# Altium PCB JD_BopIt_PCB.PcbDoc
Units mil, origin at the board's own origin, x right, y up, seen from the top; angles counter-clockwise.
Board outline 3645 x 3295 mil, 2 copper layers (Top Layer, Bottom Layer); 38 components, 58 nets, 164 pads, 0 vias.
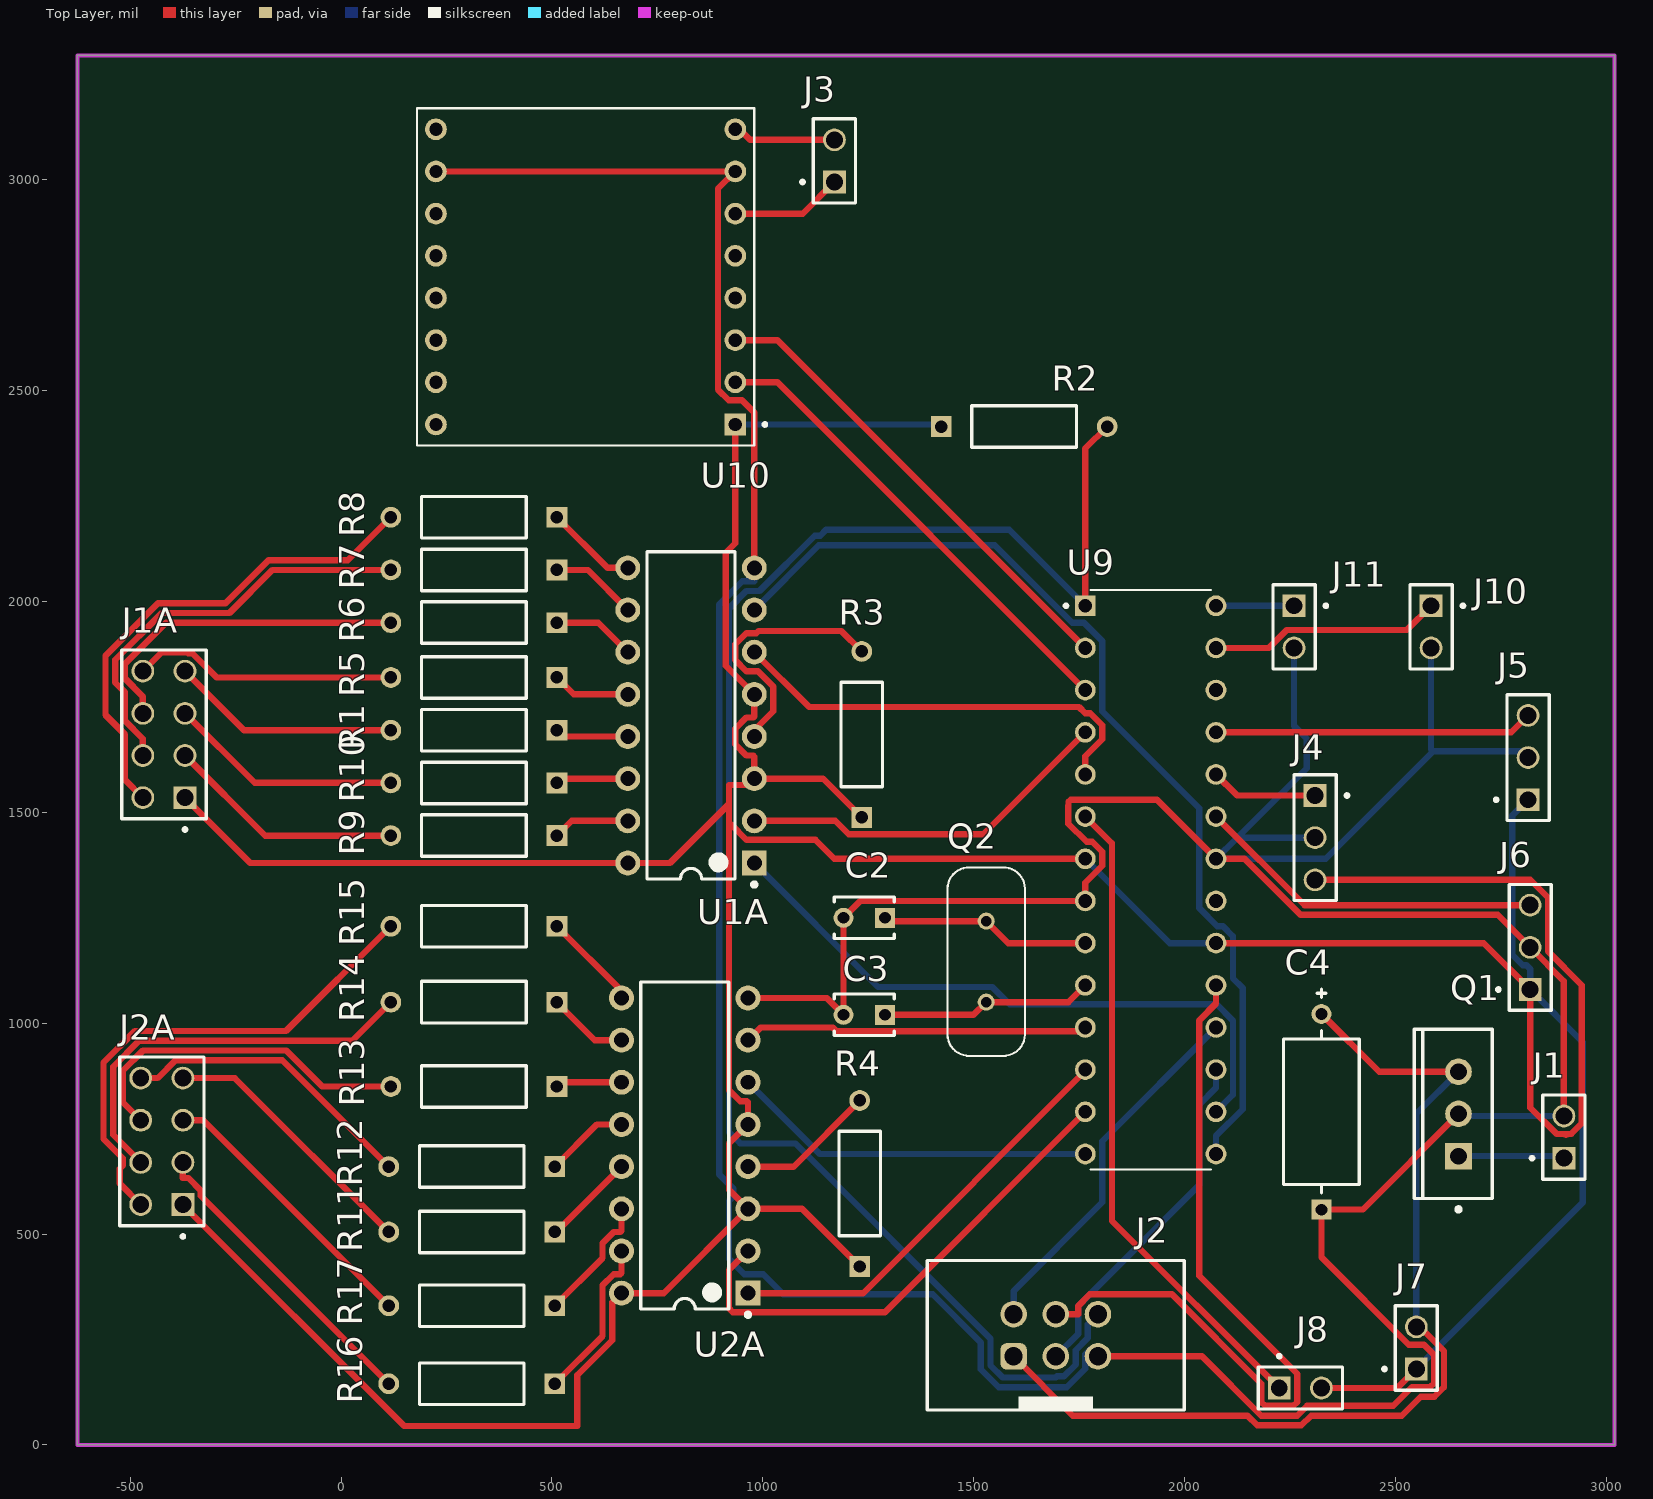
[diagram p0: Top Layer view]
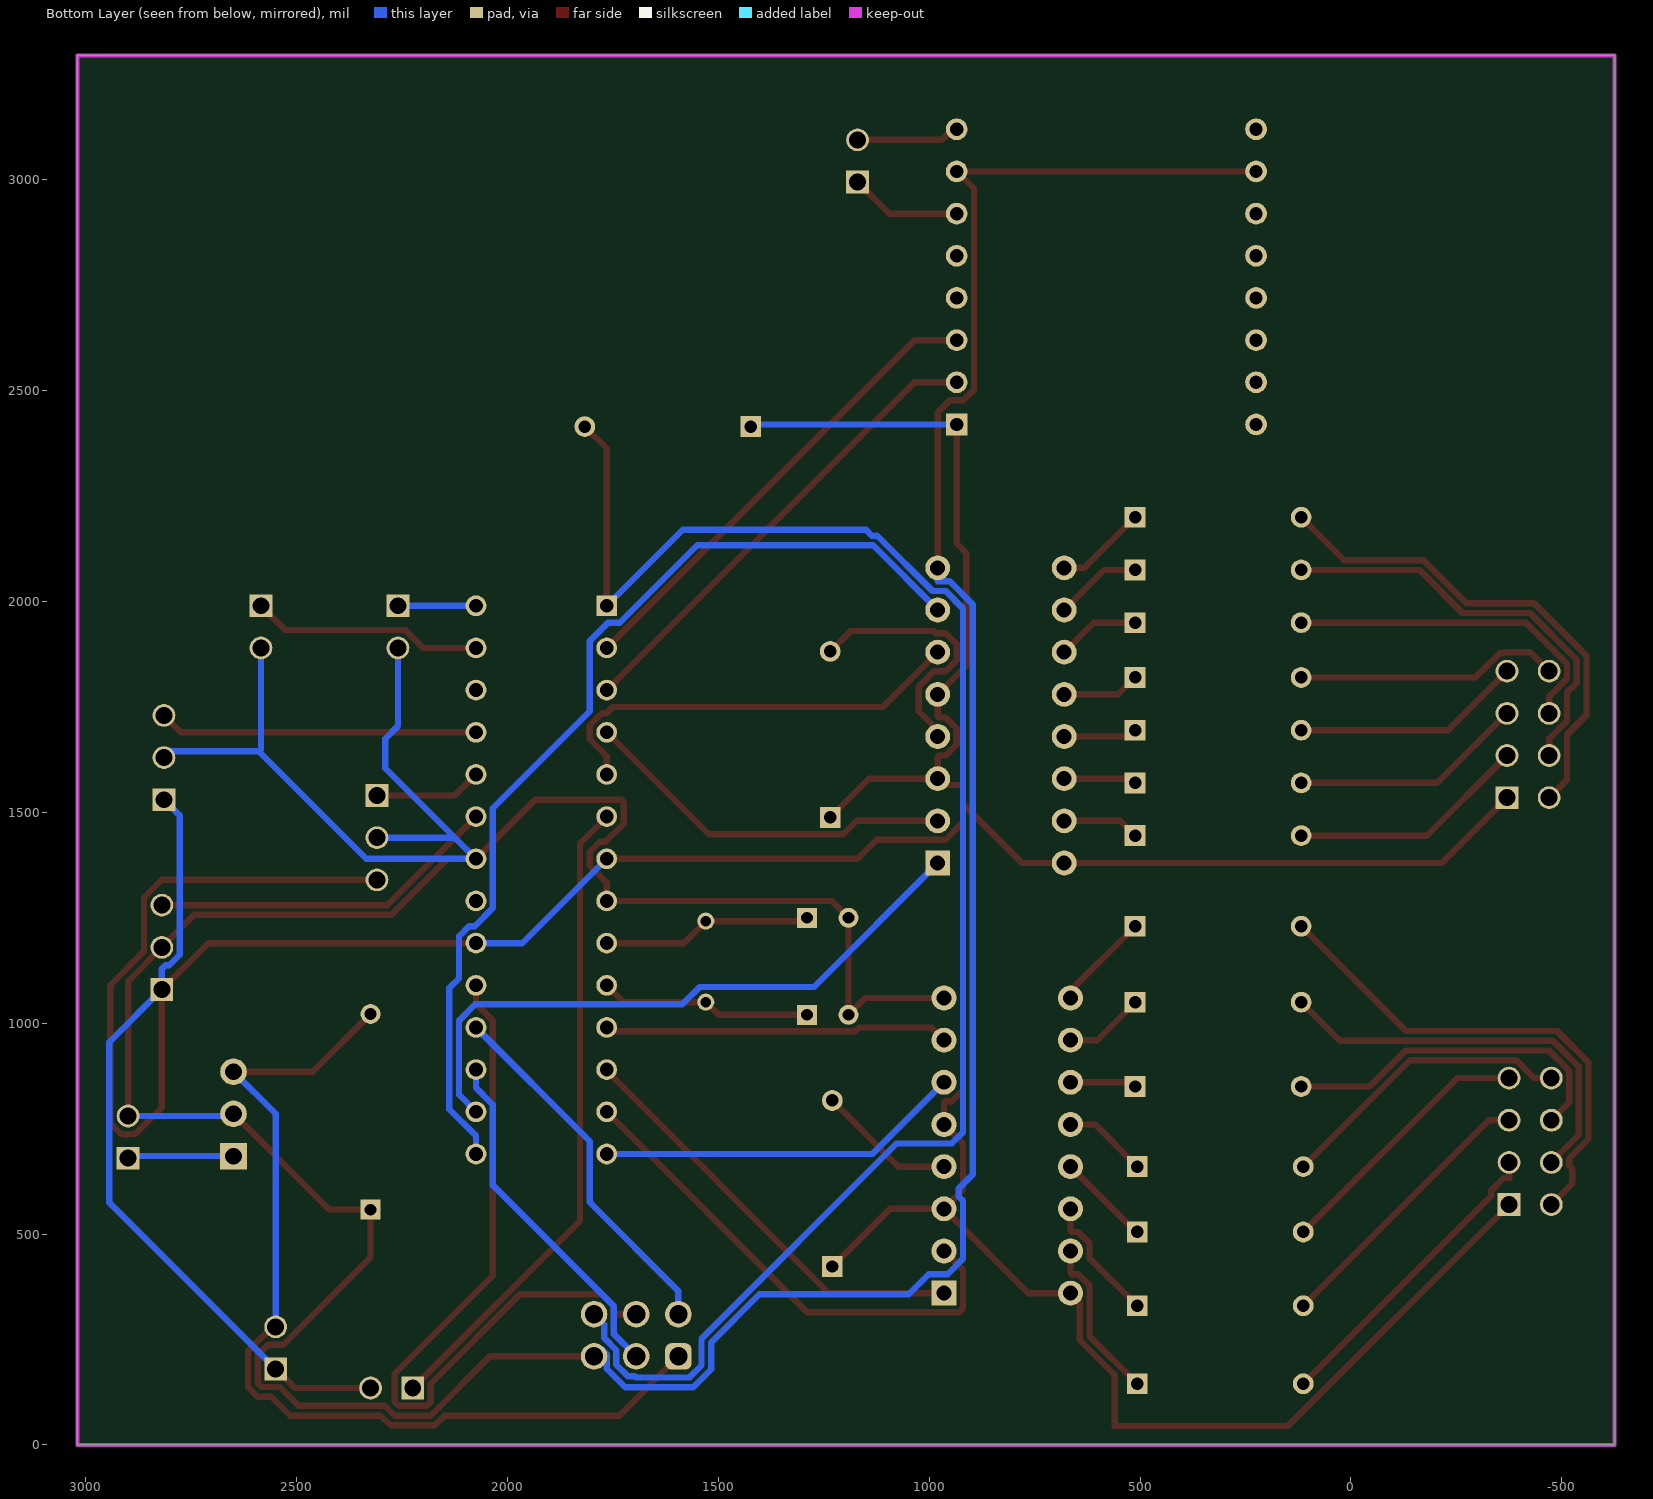
[diagram p1: Bottom Layer view, seen from below]
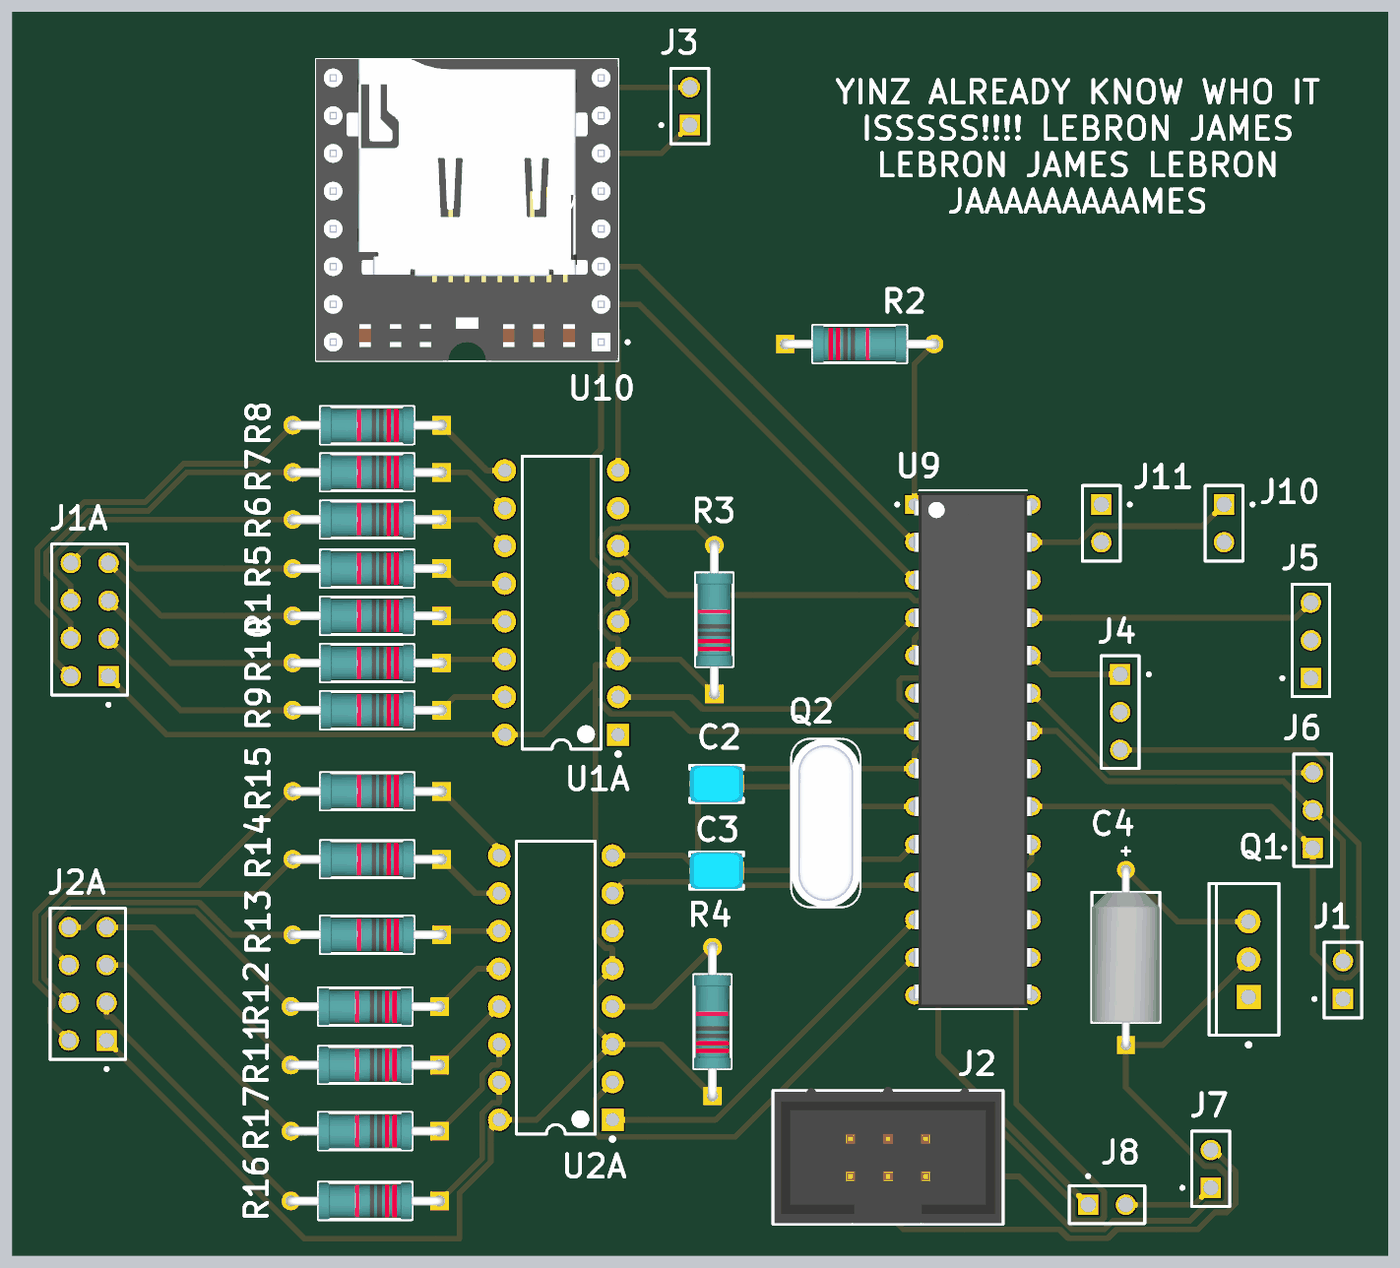
[diagram p2: 3D render of the assembled board from above, using the file's embedded part models]

## Layer stack, top to bottom
Top Solder: solder mask 0.4, Solder Resist, Dk 3.5
Top Layer: signal copper 1.4
Dielectric 1: dielectric 12.6, FR-4, Dk 4.8
Bottom Layer: signal copper 1.4
Bottom Solder: solder mask 0.4, Solder Resist, Dk 3.5

## Board outline
-625,0 3020,0 3020,3295 -625,3295

## Design rules (kind name [scope] priority, off if disabled: settings)
BoardOutlineClearance [All] p1: gap=7.87 ignorepadtopadclearanceinfootprint=FALSE except(15.75: Arc-SplitBarrior Arc-SplitContinuation Track-SplitBarrior Track-SplitContinuation SMDPad-SplitBarrior SMDPad-SplitContinuation THPad-SplitBarrior THPad-SplitContinuation Via-SplitBarrior Via-SplitContinuation Fill-SplitBarrior Fill-SplitContinuation Poly-SplitBarrior Poly-SplitContinuation Region-SplitBarrior Region-SplitContinuation Text-SplitBarrior Text-SplitContinuation)
Clearance "Clearance Bottom Layer" [OnLayer('Bottom Layer')] p1: gap=8 ignorepadtopadclearanceinfootprint=TRUE except(10: Arc-Text Track-Text SMDPad-Text THPad-Text Via-Text Fill-Text Poly-Text Region-Text Text-Text)
Clearance "Clearance Top Layer" [OnLayer('Top Layer')] p2: gap=8 ignorepadtopadclearanceinfootprint=TRUE except(10: Arc-Text Track-Text SMDPad-Text THPad-Text Via-Text Fill-Text Poly-Text Region-Text Text-Text)
Clearance [All] p3: gap=7.87 ignorepadtopadclearanceinfootprint=FALSE except(3.5: Arc-Arc Arc-Track Arc-SMDPad Track-Track Track-SMDPad SMDPad-SMDPad; 5: Arc-Via Track-Via SMDPad-Via THPad-Via Via-Via; 10: Arc-Text Track-Text SMDPad-Text THPad-Text Via-Text Fill-Text Poly-Text Region-Text Text-Text)
HoleSize [All] p1: absolutevalues=TRUE maxlimit=248.03 minlimit=7.87 maxpercent=80.000 minpercent=20.000
MinimumAnnularRing [All] p1: minimumring=3
MinimumSolderMaskSliver [All] p1: minsoldermaskwidth=3.94
PolygonConnect PolygonConnect_1 [All] p1: thpad.connectstyle=Relief thpad.reliefconductorwidth=20 thpad.reliefentries=4 thpad.polygonreliefangle="90 Angle" thpad.airgapwidth=10 smdpad.connectstyle=Relief smdpad.reliefconductorwidth=20 smdpad.reliefentries=4 smdpad.polygonreliefangle="90 Angle" smdpad.airgapwidth=10 via.connectstyle=Direct via.reliefconductorwidth=20 via.reliefentries=4 via.polygonreliefangle="90 Angle" via.airgapwidth=10
RoutingCorners [All] p1: cornerstyle=Round minsetback=100 maxsetback=100
RoutingVias [All] p1: holewidth=19.68 width=39.37 viastyle="Through Hole" minholewidth=7.87 minwidth=17.72 maxholewidth=39.37 maxwidth=78.74
SilkToSilkClearance [All] p1: silktosilkclearance=3.94
SilkToSolderMaskClearance [IsPad] p1: minsilkscreentomaskgap=3.94 clearancetoexposedcopper=TRUE
SolderMaskExpansion [All] p1: expansion=4 istentingtop=FALSE
SupplyNets "Schematic Supply Nets_1" [InNet('VCC')] p1: voltage=0.000
SupplyNets "Schematic Supply Nets" [InNet('GND')] p2: voltage=0.000
Width [All] p1: maxlimit=100 minlimit=3.5 preferedwidth=15
25 further rules are at their usual default settings.

## Components (designator, comment, footprint, x,y, rotation, side; value= is the part's Value field where it differs from the comment)
C2 "RCE5C2A220J0DBH03A" FP-RCE0DB-MFG 1240.79,1250 r180 top
C3 "RCE5C2A220J0DBH03A" FP-RCE0DB-MFG 1240.79,1020 r180 top
C4 "10 micro" FP-173DW-MFG 2325,790 r90 top
J1 "MTSW-101-09-T-D-231-LL" SAMTEC_MTSW-101-09-T-D-231-LL 2900,680 r0 top
J1A "TSW-104-09-L-D" SAMTEC_TSW-104-09-L-D -370,1535 r90 top
J2 "61200621621" 61200621621 1695,260 r0 top
J2A "TSW-104-09-L-D" SAMTEC_TSW-104-09-L-D -375,570 r90 top
J3 "MTSW-101-09-T-D-231-LL" SAMTEC_MTSW-101-09-T-D-231-LL 1170,2995 r0 top
J4 "HTSW-101-07-S-T" SAMTEC_HTSW-101-07-S-T 2310,1440 r180 top
J5 "HTSW-101-07-S-T" SAMTEC_HTSW-101-07-S-T 2815,1630 r0 top
J6 "HTSW-101-07-S-T" SAMTEC_HTSW-101-07-S-T 2820,1180 r0 top
J7 "MTSW-101-09-T-D-231-LL" SAMTEC_MTSW-101-09-T-D-231-LL 2550,180 r0 top
J8 "MTSW-101-09-T-D-231-LL" SAMTEC_MTSW-101-09-T-D-231-LL 2225,135 r270 top
J10 "MTSW-101-09-T-D-231-LL" SAMTEC_MTSW-101-09-T-D-231-LL 2585,1990 r180 top
J11 "MTSW-101-09-T-D-231-LL" SAMTEC_MTSW-101-09-T-D-231-LL 2260,1990 r180 top
Q1 "LM7805CT" FAIR-TO-220-3 2650,785 r180 top
Q2 "ECS-160-S-4" XTAL_ECS-160-20-4X 1530,1146.06 r90 top
R1 "330" FP-MBB0207-MFG 315,1695 r180 top
R2 "10K" FP-MBB0207-MFG 1620,2415 r0 top
R3 "10K" FP-MBB0207-MFG 1235,1685 r90 top
R4 "10K" FP-MBB0207-MFG 1230,620 r90 top
R5 "330" FP-MBB0207-MFG 315,1820 r180 top
R6 "330" FP-MBB0207-MFG 315,1950 r180 top
R7 "330" FP-MBB0207-MFG 315,2075 r180 top
R8 "330" FP-MBB0207-MFG 315,2200 r180 top
R9 "330" FP-MBB0207-MFG 315,1445 r180 top
R10 "330" FP-MBB0207-MFG 315,1570 r180 top
R11 "330" FP-MBB0207-MFG 310,505 r180 top
R12 "330" FP-MBB0207-MFG 310,660 r180 top
R13 "330" FP-MBB0207-MFG 315,850 r180 top
R14 "330" FP-MBB0207-MFG 315,1050 r180 top
R15 "330" FP-MBB0207-MFG 315,1230 r180 top
R16 "330" FP-MBB0207-MFG 310,145 r180 top
R17 "330" FP-MBB0207-MFG 310,330 r180 top
U1A "SN74LS247N" N0016A 830,1730 r180 top
U2A "SN74LS247N" N0016A 815,710 r180 top
U9 "ATMEGA328-PU" DIP787W46P254L3467H508Q28 1920,1340 r0 top
U10 "DFR0299" MODULE_DFR0299 580,2770 r180 top

## Footprints (in the part's own frame and the unit in brackets; to place one, negate y for a bottom-side part, rotate by r counter-clockwise, add the part's x,y. Pads: shape width x height; smd on the part's side, far side on the other; paste and mask are expansions set on the pad)
61200621621 [mm] "6 pins, straight, gold plating"
  rrect50% 1.6x1.6 hole 1.1: 1(-2.54,-1.27)
  round 1.6 hole 1.1: 2(-2.54,1.27) 3(0,-1.27) 4(0,1.27) 5(2.54,-1.27) 6(2.54,1.27)
  silkscreen extent -7.74,-4.5 7.74,4.5, body extent -7.64,-4.43 7.64,4.75, height 9.13
DIP787W46P254L3467H508Q28 [mm]
  rect 1.25x1.25 / inner round 1.25 / far side rect 1.25x1.25 hole 0.83: 1(-3.937,16.51)
  round 1.25 hole 0.83: 2(-3.937,13.97) 3(-3.937,11.43) 4(-3.937,8.89) 5(-3.937,6.35) 6(-3.937,3.81) 7(-3.937,1.27) 8(-3.937,-1.27) 9(-3.937,-3.81) 10(-3.937,-6.35) 11(-3.937,-8.89) 12(-3.937,-11.43) 13(-3.937,-13.97) 14(-3.937,-16.51) 15(3.937,-16.51) 16(3.937,-13.97) 17(3.937,-11.43) 18(3.937,-8.89) 19(3.937,-6.35) 20(3.937,-3.81) 21(3.937,-1.27) 22(3.937,1.27) 23(3.937,3.81) 24(3.937,6.35) 25(3.937,8.89) 26(3.937,11.43) 27(3.937,13.97) 28(3.937,16.51)
  silkscreen extent -5.2,-17.45 3.62,17.45, body extent -3.95,-17.34 3.95,17.34, height 4.57
FAIR-TO-220-3 [mm] "FM, 3-Leads, Body 10.2x4.7mm, Pitch 2.54mm"
  rect 1.6x1.6 hole 1: 1(0,2.54)
  round 1.6 hole 1: 2(0,0) 3(0,-2.54)
  silkscreen extent -2.04,-5.1 2.66,5.87, body extent -2.04,-5.1 2.66,5.1, height 18.95
FP-173DW-MFG [mm]
  rect 1.2x1.2 hole 0.7 paste-2539.97 mask+0: 1(-5.89,0)
  round 1.2 hole 0.7 paste-2539.97 mask+0: 2(5.89,0)
  silkscreen extent -4.89,-2.28 7.4,2.28, body extent -6.59,-2.38 6.59,2.38, height 0.25
FP-MBB0207-MFG [mm]
  rect 1.25x1.25 hole 0.75 paste-2539.97 mask+0: 1(-5,0)
  round 1.25 hole 0.75 paste-2539.97 mask+0: 2(5,0)
  silkscreen extent -3.15,-1.25 3.15,1.25, body extent -5.72,-1.35 5.72,1.35, height 0.25
FP-RCE0DB-MFG [mm]
  rect 1.2x1.2 hole 0.7 paste-2539.97 mask+0: 1(-1.25,0)
  round 1.2 hole 0.7 paste-2539.97 mask+0: 2(1.25,0)
  silkscreen extent -1.8,-1.25 1.8,1.25, body extent -1.95,-1.35 1.95,1.35, height 0.25
MODULE_DFR0299 [mil]
  rect 51.5x51.5 / inner round 51.5 / far side rect 51.5x51.5 hole 31.5: 1(-355,350)
  round 51.5 hole 31.5: 2(-355,250) 3(-355,150) 4(-355,50) 5(-355,-50) 6(-355,-150) 7(-355,-250) 8(-355,-350) 9(355,-350) 10(355,-250) 11(355,-150) 12(355,-50) 13(355,50) 14(355,150) 15(355,250) 16(355,350)
  silkscreen extent -429,-400 400,400, body extent -400,-400 400,400, height 246
N0016A [mm] "DIP, 16-Leads, Body 19.7x6.6mm, Pitch 2.54mm"
  rect 1.5x1.5 hole 0.9: 1(-3.81,8.89)
  round 1.5 hole 0.9: 2(-3.81,6.35) 3(-3.81,3.81) 4(-3.81,1.27) 5(-3.81,-1.27) 6(-3.81,-3.81) 7(-3.81,-6.35) 8(-3.81,-8.89) 9(3.81,-8.89) 10(3.81,-6.35) 11(3.81,-3.81) 12(3.81,-1.27) 13(3.81,1.27) 14(3.81,3.81) 15(3.81,6.35) 16(3.81,8.89)
  silkscreen extent -3.94,-9.85 2.65,10.31, body extent -3.95,-9.85 3.95,9.85, height 5.08
SAMTEC_HTSW-101-07-S-T [mm]
  rect 1.37x1.37 / inner round 1.37 / far side rect 1.37x1.37 hole 1.02: 01(0,-2.54)
  round 1.37 hole 1.02: 02(0,0) 03(0,2.54)
  silkscreen extent -2.02,-3.78 1.27,3.78
SAMTEC_MTSW-101-09-T-D-231-LL [mm]
  rect 1.37x1.37 hole 1.02: 01(0,0)
  round 1.37 hole 1.02: 02(0,2.54)
  silkscreen extent -2.02,-1.27 1.27,3.81
SAMTEC_TSW-104-09-L-D [mm]
  rect 1.37x1.37 hole 1.02: 01(0,0)
  round 1.37 hole 1.02: 02(0,2.54) 03(2.54,0) 04(2.54,2.54) 05(5.08,0) 06(5.08,2.54) 07(7.62,0) 08(7.62,2.54)
  silkscreen extent -2.02,-1.27 8.89,3.81
XTAL_ECS-160-20-4X [mm]
  round 1.03 hole 0.63: 1(-2.44,0) 2(2.44,0)
  silkscreen extent -5.68,-2.33 5.68,2.33, body extent -5.68,-2.32 5.68,2.32, height 3.5

## Part data
C2 C3: library part CMP-06035-047347-1, "Cap Ceramic 22pF 100V C0G ±5% Radial 2.5mm +125°C Ammo Pack", Capacitance=22pF, Case/Package=Radial, Dielectric=C0G, Max Operating Temperature=125°C, Min Operating Temperature=-55°C, Package Quantity=2000, Ratings=AEC-Q200, Resistor Type=Ceramic, Tolerance=5%, Voltage=100V, Depth=2.5mm, Height=3.5mm, Height - Seated (Max)=0.138inch, Lead Diameter=0.5mm, Lead Pitch=0.098inch, Lead/Base Style=Straight, Length=3.6mm, Mount="Through Hole", Packaging="Tape and Reel", Termination=Radial, Voltage Rating=100V, Voltage Rating (DC)=100V, Width=0.098inch
C4: library part CMP-00030-42256642-1, "173D106X9025WWE3 173D Series 10 uF ±10% 25 V Axial Solid Electrolyte Tantalum Capacitor", Capacitance=10µF, Case/Package=Axial, Leakage Current=1.5µA, Max Operating Temperature=85°C, Min Operating Temperature=-55°C, Tolerance=10%, Voltage Rating=25V, Contact Plating=Tin, Depth=4.57mm, Diameter=4.572mm, Dissipation Factor=4%, Features="General Purpose", Height=4.57mm, Lead Diameter=510µm, Lead Free="Lead Free", Length=8.76mm, Mount="Through Hole", NexarPartId=42256642, Number of Pins=2, Packaging="Cut Tape (CT)", Polarity=Polar, Radiation Hardening=No, REACH SVHC=Unknown, RoHS=Compliant, Schedule B="8532210080, 8532210080", Termination=Axial, Voltage Rating (DC)=25V
J1 J1A J2A J3 J7 J8 J10 J11: Package=None, Availability=Unavailable, Price=None
  J1 J3 J7 J8 J10 J11: MP=MTSW-101-09-T-D-231-LL
  J1A J2A: MP=TSW-104-09-L-D
J2: "WR-BHD Male Box Header, THT Straight, pitch 2.54mm, 2 row, 6 pin", Contact Resistance=20mOhm, Insulation Resistance=1000MOhm, Manufacturer="Wurth Elektronik", Operating Temperature Max=105°C, Operating Temperature Min=-40°C, Rated Current=3A, Withstanding Voltage=500V, Working Voltage=250V, Category="Wire-to-Board Connectors", ComponentLink1Description="Website Link", ComponentLink1URL=https://www.we-online.com/redexpert/article/61200621621?ad, ComponentLink2Description="Datasheet Link", ComponentLink2URL=https://www.we-online.com/redexpert/spec/61200621621?ad, Gender=Male, Height=9.1mm, Length=15.28mm, Manufacturer Part Number=61200621621, Match Code=WR-BHD, Mount="Through Hole", Number of Pins=6, Number of Rows=2, Orientation=Straight, Packaging=Tray, Pitch=2.54mm, Width=9.1mm
J4 J5 J6: "Connector Header Through Hole 3 position", Package=None, Check_prices=https://www.snapeda.com/parts/HTSW-101-07-S-T/Samtec/view-part/?ref=eda, MF=Samtec, MP=HTSW-101-07-S-T, SnapEDA_Link=https://www.snapeda.com/parts/HTSW-101-07-S-T/Samtec/view-part/?ref=snap
Q1: library part CMP-2000-04938-1, "Positive Voltage Regulator, 5 V, 1 A, -40 to 125 degC, 3-Pin TO-220, RoHS, Tube", Manufacturer=FairchildSemiconductor, Maximum Input Voltage=35V, Maximum Output Current=2.2(Typ)A, Maximum Quiescent Current=8mA, Operating Temperature=-40to125degC, Output Voltage=5V, Package=3TO-220AB, Package Description="3-Pin Through Hole Device, Body 10 x 4.5 mm, Pitch 2.54 mm", Package Reference=TO-220, Typical Dropout Voltage @ Current=2@1AV, Accuracy=±4%, Category=LinearRegulator, Datasheet URL=https://datasheet.ciiva.com/26904/lm7805ct-26904988.pdf, Datasheet Version=Aug-12, Line Regulation=100mV, Load Regulation=100mV, Manufacturer URL=https://www.fairchildsemi.com/, Mounting=ThroughHole, Number of Outputs=1, Output Type=Fixed, Package URL=https://www.fairchildsemi.com/package-drawings/TO/TO220B03.pdf, Packaging=Rail/Tube, Polarity=Positive, Rad Hard=No, Type=Linear
Q2: "16 MHz Â±30ppm Crystal Series 40 Ohms HC-49/US", Package="HC-49US ECS Inc.", Check_prices=https://www.snapeda.com/parts/ECS-160-S-4/ECS/view-part/?ref=eda, MF="ECS Inc.", MP=ECS-160-S-4, SnapEDA_Link=https://www.snapeda.com/parts/ECS-160-S-4/ECS/view-part/?ref=snap
R1 R2 R3 R4 R5 R6 R7 R8 R9 R10 R11 R12 R13 R14 R15 R16 R17: library part CMP-02408-000035-1, "RES 10K OHM 0.6W 1% AXIAL", Case/Package=Conformal, Max Operating Temperature=155°C, Max Power Dissipation=600mW, Min Operating Temperature=-55°C, Resistance=10kR, Resistance Tolerance=1%, Resistor Type="Metal Film", Temperature Coefficient=50ppm/°C, Voltage Rating=300V, Construction=Cylindrical, Contact Plating=Tin, Diameter=2.5mm, Features="Automotive AEC-Q200", Lead Free="Lead Free", Length=6.5mm, Military Standard=Not, Number of Terminations=2, Packaging="Tape and Reel", Power Rating=600mW, Radiation Hardening=No, RoHS Compliant=Yes, Series="MBB 0207 - Professional", Technology="THIN FILM", Termination=Axial, Tolerance=1%, Voltage Rating (DC)=300V
U1A U2A: library part CMP-0388-00310-2, "BCD-to-7-Segment Decoder / Driver, 4.75 to 5.25 V, 0 to 70 degC, 16-pin DIP (N16), Pb-Free (RoHS)", Manufacturer="Texas Instruments", Rating=Catalog, Code_JEDEC=MS-001, ComponentLink1Description="Manufacturer URL", ComponentLink1URL=http://www.ti.com/, ComponentLink2Description=Datasheet, ComponentLink2URL=http://www.ti.com/general/docs/lit/getliterature.tsp?genericPartNumber=SN74LS247&fileType=pdf, ComponentLink3Description="Package Specification", ComponentLink3URL=http://www.ti.com/litv/pdf/mpdi002c, DatasheetVersion=SDLS083, Eco-Plan="Pb-Free (RoHS)", Mounting Technology="Through Hole", PackageDescription="16-Pin Plastic In-Line, Body 19.305 x 6.35 mm, Pitch 2.54 mm", PackageReference=N0016A, PackageVersion=4040049/E, PartNumber=SN74LS247N, SubFamily="Discrete Segment LED Driver", Vin(Max)(V)=5.25, Vin(Min)(V)=4.75
U9: "AVR AVRÂ® ATmega Microcontroller IC 8-Bit 20MHz 32KB (16K x 16) FLASH 28-PDIP", Package="DIP-28 Microchip Technology", Availability="In Stock", Check_prices=https://www.snapeda.com/parts/ATMEGA328-PU/Microchip/view-part/?ref=eda, MF=Microchip, MP=ATMEGA328-PU, Price=None, Purchase-URL=https://pricing.snapeda.com/search/part/ATMEGA328-PU/?ref=eda, SnapEDA_Link=https://www.snapeda.com/parts/ATMEGA328-PU/Microchip/view-part/?ref=snap
U10: "- MP3 Player Audio Arduino Platform Evaluation Expansion Board", Package=None, Check_prices=https://www.snapeda.com/parts/DFR0299/DFRobot/view-part/?ref=eda, MF=DFRobot, MP=DFR0299, SnapEDA_Link=https://www.snapeda.com/parts/DFR0299/DFRobot/view-part/?ref=snap

## Nets (pads, with @x,y where several pads share a name; then routed paths per layer and width w, separated by ;. In a path a pad name is that pad's centre, name@x,y a point inside that pad or via, vN(x,y) a via of type N, cw(c..) or ccw(c..) an arc to the next point about the centre after c; other vN are vias at no path point)
GND: C2.2 C3.2 C4.1 J1.02 J2.5 J4.02 J5.02 J6.02 J10.02 J11.02 Q1.2 U1A.8 U2A.8 U9.8 U9.22 U10.7 U10.10 | length 11557
  Top Layer w15: U10.10 U10.7 893.75,2978.75 893.75,2502.91 919.12,2477.54 950.88,2477.54 980,2448.42 U1A.8 ; U2A.8 1151.57,1060 C3.2 C2.2 1231.57,1290 U9.8 1765,1333.28 1805.11,1373.39 1805.11,1406.61 1781.61,1430.11 1768.17,1430.11 1724.89,1473.39 1724.89,1515.86 1725,1515.97 1725,1525 1730.11,1530.11 1934.89,1530.11 U9.22 2142.47,1390 2275.47,1257 2743,1257 J6.02 2900,1100 J1.02@2900,775 ; J2.5 2041.62,210 2182.08,69.53 2267.92,69.53 2290.92,92.53 2495.06,92.53 2540.06,137.53 2583.39,137.53 2592.47,146.61 2592.47,213.39 2568.33,237.53 2532.41,237.53 2325,444.94 C4.1 2423.11,558.11 Q1.2
  Bottom Layer w15: U1A.8 980,2048.03 951.82,2048.03 896.97,1993.18 896.97,641.16 930,608.13 930,588.68 919.97,578.65 919.97,441.35 956.29,405.03 1000.95,405.03 1048.98,357 1402.95,357 1517,242.95 1517,179.79 1559.79,137 1720.99,137 1765,181.01 1765,214.94 1777.53,227.47 J2.5 ; J11.02 2260,1704.95 2289.91,1675.04 2289.91,1604.91 2125,1440 ; J4.02 2125,1440 ; J10.02 2585,1650 2590,1645 ; Q1.2 2655,780 J1.02@2895,780 ; J5.02 2800,1645 2590,1645 ; J1.02 J1.02@2905,775 ; 2125,1440 U9.22 2335,1390 2590,1645
"GRN LED": J11.01 U9.28 | length 185
  Bottom Layer w15: U9.28 J11.01
NetC2_1: C2.1 Q2.2 U9.9 | length 499.9
  Top Layer w15: C2.1 1297.87,1242.13 Q2.2 1582.13,1190 U9.9
NetC3_1: C3.1 Q2.1 U9.10 | length 504
  Top Layer w15: C3.1 1500,1020 Q2.1 1725,1050 U9.10
NetC4_2: C4.2 J2.1 J7.02 Q1.3 | length 2328.8
  Top Layer w15: J2.1 1735.47,69.53 2149.56,69.53 2172.56,46.53 2277.44,46.53 2300.44,69.53 2515.39,69.53 2560.39,114.53 2592.92,114.53 2615.47,137.08 2615.47,222.92 2558.38,280 J7.02 ; C4.2 2461.89,885 Q1.3
  Bottom Layer w15: J7.02 2550,785 Q1.3
NetJ1_01: J1.01 Q1.1 | length 252.1
  Bottom Layer w15: Q1.1 2895,685 J1.01
NetJ1A_02: J1A.02 R8.2 | length 1185.9
  Top Layer w15: J1A.02 -512.47,1577.47 -512.47,1684.88 -558.47,1730.88 -558.47,1871.64 -434.11,1996 -274,1996 -172,2098 16.15,2098 R8.2
NetJ1A_03: J1A.03 R9.2 | length 566.9
  Top Layer w15: J1A.03 -180,1445 R9.2
NetJ1A_04: J1A.04 R7.2 | length 996
  Top Layer w15: J1A.04 -470,1674.94 -512.47,1717.41 -512.47,1784.88 -535.47,1807.88 -535.47,1862.12 -424.59,1973 -264.47,1973 -162.47,2075 R7.2
NetJ1A_05: J1A.05 R10.2 | length 556.5
  Top Layer w15: J1A.05 -205,1570 R10.2
NetJ1A_06: J1A.06 R6.2 | length 806.1
  Top Layer w15: J1A.06 -470,1774.94 -512.47,1817.41 -512.47,1852.59 -415.06,1950 R6.2
NetJ1A_07: J1A.07 R1.2 | length 546.1
  Top Layer w15: J1A.07 -230,1695 R1.2
NetJ1A_08: J1A.08 R5.2 | length 631.6
  Top Layer w15: J1A.08 -425,1880 -365,1880 -362.47,1877.47 -352.41,1877.47 -294.94,1820 R5.2
NetJ2_2: J2.2 U9.18 | length 878.8
  Bottom Layer w15: J2.2 1595,365.15 1805.11,575.25 1805.11,720.11 U9.18
NetJ2_3: J2.3 U9.17 | length 837.4
  Bottom Layer w15: J2.3 1748,263 1748,329.47 2034.89,616.36 2034.89,806.61 2075,846.72 U9.17
NetJ2_4: J2.4 U9.19 | length 1843.5
  Top Layer w15: J2.4 1748,310 1748,329.47 1775.53,357 1970.48,357 2182.53,144.94 2182.53,101.61 2191.61,92.53 2258.39,92.53 2267.47,101.61 2267.47,168.39 2034.89,400.96 2034.89,906.61 2035,906.72 2035,959.03 2034.89,959.14 2034.89,1006.61 2075,1046.72 U9.19
NetJ2_6: J2.6 R2.2 U9.1 | length 3939.5
  Top Layer w15: U9.1 1765,2363.15 R2.2
  Bottom Layer w15: 919.97,779.34 919.97,741.35 946.35,714.97 1077.5,714.97 1540,252.47 1540,189.31 1569.31,160 1695,160 1698,163 1714.47,163 1742,190.53 1742,224.47 1771,253.48 1771,286 J2.6 ; 919.97,841.35 919.97,1983.65 961.35,2025.03 992.5,2025.03 1123.73,2156.26 1136.26,2156.26 1150,2170 1585,2170 U9.1 ; 920,779.37 920,841.32
NetJ2A_02: J2A.02 R15.2 | length 1195.1
  Top Layer w15: J2A.02 -525,620 -525,655 -517.47,662.53 -517.47,679.94 -563.47,725.94 -563.47,906.64 -488.64,981.47 -130.38,981.47 R15.2
NetJ2A_03: J2A.03 R16.2 | length 734.6
  Top Layer w15: J2A.03 -375,633.15 -362.29,633.15 -332.53,603.39 -332.53,590.68 R16.2
NetJ2A_04: J2A.04 R14.2 | length 976.2
  Top Layer w15: J2A.04 -540.47,735.47 -540.47,897.12 -479.12,958.47 26.62,958.47 R14.2
NetJ2A_05: J2A.05 R17.2 | length 670.4
  Top Layer w15: J2A.05 -326.85,770 R17.2
NetJ2A_06: J2A.06 R13.2 | length 826
  Top Layer w15: J2A.06 -517.47,812.47 -517.47,887.59 -469.59,935.47 -129.79,935.47 -44.32,850 R13.2
NetJ2A_07: J2A.07 R11.2 | length 639.3
  Top Layer w15: J2A.07 -251.85,870 R11.2
NetJ2A_08: J2A.08 R12.2 | length 710.3
  Top Layer w15: J2A.08 -435.06,870 -392.59,912.47 -139.32,912.47 R12.2
NetJ3_01: J3.01 U10.6 | length 266.1
  Top Layer w15: U10.6 1095,2920 J3.01
NetJ3_02: J3.02 U10.8 | length 245.4
  Top Layer w15: U10.8 944.88,3120 969.88,3095 J3.02
NetJ4_01: J4.01 U9.24 | length 255.7
  Top Layer w15: U9.24 2125,1540 J4.01
NetJ5_03: J5.03 U9.25 | length 756.6
  Top Layer w15: U9.25 2775,1690 J5.03
NetJ6_03: J6.03 U9.23 | length 832
  Top Layer w15: U9.23 2285,1280 J6.03
NetJ8_01: J8.01 U9.6 | length 1545.5
  Top Layer w15: U9.6 1828.11,1426.89 1828.11,531.89 J8.01
NetR1_1: R1.1 U1A.13 | length 174.4
  Top Layer w15: R1.1 526.85,1680 U1A.13
NetR3_2: R3.2 U1A.4 | length 627.6
  Top Layer w15: U1A.4 980,1702.03 986.92,1702.03 1025.03,1740.14 1025.03,1798.65 988.71,1834.97 961.35,1834.97 934.97,1861.35 934.97,1898.65 961.35,1925.03 985.03,1925.03 990,1930 1186.85,1930 R3.2
NetR4_2: R4.2 U2A.4 | length 330
  Top Layer w15: U2A.4 1073.15,660 R4.2
NetR5_1: R5.1 U1A.12 | length 184.7
  Top Layer w15: R5.1 551.85,1780 U1A.12
NetR6_1: R6.1 U1A.11 | length 197.1
  Top Layer w15: R6.1 610,1950 U1A.11
NetR7_1: R7.1 U1A.10 | length 207.5
  Top Layer w15: R7.1 585,2075 U1A.10
NetR8_1: R8.1 U1A.9 | length 217.9
  Top Layer w15: R8.1 631.85,2080 U1A.9
NetR9_1: R9.1 U1A.15 | length 182.6
  Top Layer w15: R9.1 546.85,1480 U1A.15
NetR10_1: R10.1 U1A.14 | length 172.3
  Top Layer w15: R10.1 521.85,1580 U1A.14
NetR11_1: R11.1 U2A.13 | length 222.4
  Top Layer w15: R11.1 510,505 U2A.13
NetR12_1: R12.1 U2A.12 | length 199.6
  Top Layer w15: R12.1 606.85,760 U2A.12
NetR13_1: R13.1 U2A.11 | length 157.3
  Top Layer w15: R13.1 521.85,860 U2A.11
NetR14_1: R14.1 U2A.10 | length 190.4
  Top Layer w15: R14.1 601.85,960 U2A.10
NetR15_1: R15.1 U2A.9 | length 233.4
  Top Layer w15: R15.1 665,1076.85 U2A.9
NetR16_1: R16.1 U2A.15 | length 389.9
  Top Layer w15: R16.1 619.97,258.12 619.97,378.65 646.35,405.03 662.39,405.03 665,407.64 U2A.15
NetR17_1: R17.1 U2A.14 | length 304.9
  Top Layer w15: R17.1 619.97,443.12 619.97,478.65 646.35,505.03 662.39,505.03 665,507.64 U2A.14
NetU1A_1: U1A.1 U9.16 | length 1523
  Bottom Layer w15: U1A.1 1274.22,1085.78 1544.82,1085.78 1585.59,1045 2076.72,1045 2115.11,1006.61 2115.11,830.11 U9.16
NetU1A_2: U1A.2 U9.4 | length 898.5
  Top Layer w15: U1A.2 1172.02,1480 1203.97,1448.04 1523.04,1448.04 U9.4
NetU1A_6: U1A.6 U9.5 | length 1030.2
  Top Layer w15: U1A.6 1110.11,1749.89 1750,1749.89 1765,1734.89 1776.83,1734.89 1805.11,1706.61 1805.11,1673.39 1765,1633.28 U9.5
NetU1A_7: U1A.7 U9.15 | length 2371
  Bottom Layer w15: U1A.7 1133.26,2133.26 1550.61,2133.26 1733.97,1949.89 1761.83,1949.89 1805.11,1906.61 1805.11,1739.79 2034.89,1510 2034.89,1273.39 2078.17,1230.11 2091.61,1230.11 2115.11,1206.61 2115.11,1106.61 2138.11,1083.61 2138.11,796.39 2075,733.28 U9.15
NetU2A_1: U2A.1 U9.12 | length 1021.3
  Top Layer w15: U2A.1 1237.98,360 1765,887.02 U9.12
NetU2A_2: U2A.2 U9.13 | length 1200.2
  Top Layer w15: U2A.2 919.97,414.97 919.97,324.05 929.05,314.97 1289.97,314.97 U9.13
NetU2A_6: U2A.6 U9.14 | length 870.4
  Bottom Layer w15: U2A.6 1135,690 U9.14
NetU2A_7: U2A.7 U9.11 | length 825.3
  Top Layer w15: U2A.7 995,990 1166.25,990 1175.37,980.88 1765,980.88 U9.11
NetU9_2: U9.2 U10.3 | length 1132.4
  Top Layer w15: U10.3 1035,2620 U9.2
NetU9_3: U9.3 U10.2 | length 1132.4
  Top Layer w15: U10.2 1035,2520 U9.3
"RED LED": J10.01 U9.27 | length 551.4
  Top Layer w15: U9.27 2199.94,1890 2242.41,1932.47 2527.47,1932.47 J10.01
VCC: J1A.01 J2A.01 J4.03 J5.01 J6.01 J7.01 J8.02 R2.1 R3.1 R4.1 U1A.3 U1A.5 U1A.16 U2A.3 U2A.5 U2A.16 U9.7 U9.20 U10.1 | length 11964.9
  Top Layer w15: J2A.01 150,45 560,45 560,165.62 642.97,248.6 642.97,337.97 U2A.16 765,360 U2A.3 ; J1A.01 -215,1380 U1A.16 780,1380 919.97,1519.97 ; 925,1471.32 961.35,1434.97 1125.03,1434.97 1170,1390 U9.7 ; U10.1 935,2138.3 911.97,2115.27 911.97,1848.03 U1A.5 980,1727.64 977.39,1725.03 961.35,1725.03 934.97,1698.65 934.97,1661.35 961.35,1634.97 977.39,1634.97 980,1632.36 U1A.3 ; R4.1 1093.15,560 U2A.3 ; R3.1 1143.15,1580 U1A.3 ; U9.20 2710,1190 J6.01 2820,799.94 2882.41,737.53 2902.47,737.53 2905,735 2907.53,737.53 2917.59,737.53 2942.47,762.41 2942.47,1090.06 2862.47,1170.06 2862.47,1297.59 2820.06,1340 J4.03 ; J8.02 2505,135 J7.01 ; 919.97,1519.97 919.97,841.35 946.35,814.97 962.39,814.97 965,812.36 U2A.5 919.97,714.97 919.97,605.03 U2A.3 ; 919.97,1519.97 919.97,1565 965,1565 U1A.3
  Bottom Layer w15: U10.1 1418.15,2420 R2.1 ; U9.7 1965,1190 U9.20 ; J7.01 2945,575 2945,955 J6.01 2820,1128.74 2811.21,1137.53 2802.41,1137.53 2777.53,1162.41 2777.53,1492.53 J5.01
pads on no net: U9.21 U9.26 U10.4 U10.5 U10.9 U10.11 U10.12 U10.13 U10.14 U10.15 U10.16

## Keep-outs
Keep-Out Layer:
  lines w10: -625,0 -5,0 3020,0 3020,3295 -5,3295 -625,3295 -625,0

## Silkscreen, mask and mechanical layers (free items; w line width, h text height)
Top Overlay:
  text "YINZ ALREADY KNOW WHO IT ISSSSS!!!! LEBRON JAMES LEBRON JAMES LEBRON JAAAAAAAAAMES" at 1495,2700 h60